# Altium PCB 3V3_Load_Switch_Bodge.PcbDoc
Units mm, origin at the board's own origin, x right, y up, seen from the top; angles counter-clockwise.
Board outline 9.5 x 12.5 mm, 2 copper layers (Top Layer, Bottom Layer); 16 components, 7 nets, 32 pads, 15 vias.
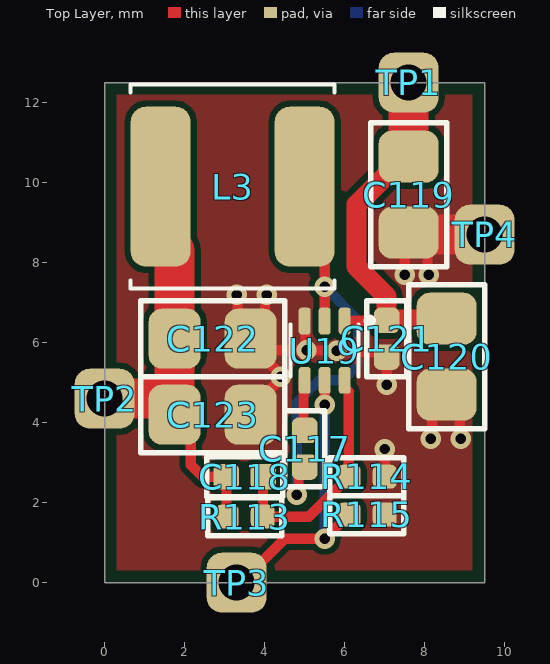
[diagram p0: Top Layer view]
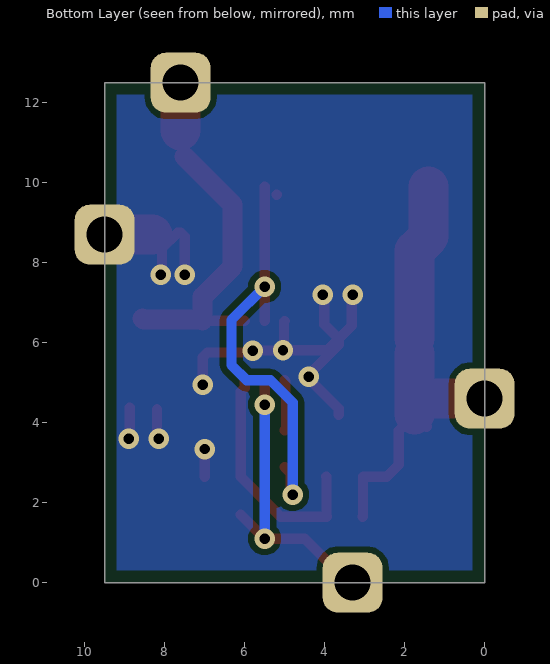
[diagram p1: Bottom Layer view, seen from below]

## Layer stack, top to bottom
Top Solder: solder mask 0.0102, Solder Resist, Dk 3.5
Top Layer: signal copper 0.0356
Dielectric 1: dielectric 0.32, FR-4, Dk 4.8
Bottom Layer: signal copper 0.0356
Bottom Solder: solder mask 0.0102, Solder Resist, Dk 3.5

## Board outline
0,0 9.5,0 9.5,12.5 0,12.5

## Design rules (kind name [scope] priority, off if disabled: settings)
BoardOutlineClearance [All] p1: gap=0.3 ignorepadtopadclearanceinfootprint=FALSE
Clearance [All] p1: gap=0.152 ignorepadtopadclearanceinfootprint=FALSE
HoleSize [All] p1: absolutevalues=TRUE maxlimit=15 minlimit=0.025 maxpercent=80.000 minpercent=20.000
HoleToHoleClearance [All] p1: gap=0 allowstackedmicrovias=TRUE
MinimumSolderMaskSliver [All] p1: minsoldermaskwidth=0.102
PlaneConnect [All] p1: planeconnectstyle=Direct reliefexpansion=0.508 reliefentries=4 reliefconductorwidth=0.254 reliefairgap=0.254
PolygonConnect [All] p1: connectstyle=Direct reliefconductorwidth=0.254 reliefentries=4 polygonreliefangle="90 Angle" airgapwidth=0.254
RoutingVias [All] p1: holewidth=0.254 width=0.508 viastyle="Through Hole" minholewidth=0.254 minwidth=0.508 maxholewidth=0.254 maxwidth=0.508
SolderMaskExpansion [All] p1: expansion=0.038 istentingtop=FALSE
Width [All] p1: maxlimit=1 minlimit=0.152 preferedwidth=0.254 minimp=50.000000 maximp=50.000000 favimp=50.000000
26 further rules are at their usual default settings.

## Components (designator, comment, footprint, x,y, rotation, side; value= is the part's Value field where it differs from the comment)
C117 "100nF" GEN_C_0402 5,3.35 r90 top
C118 "39pF" GEN_C_0402 3.5,2.65 r180 top
C119 "22uF" GEN_C_0805 7.6,9.7 r90 top
C120 "22uF" GEN_C_0805 8.55,5.65 r90 top
C121 "100nF" GEN_C_0402 7.05,6.1 r270 top
C122 "22uF" GEN_C_0805 2.7,6.1 r180 top
C123 "22uF" GEN_C_0805 2.7,4.2 r180 top
L3 "4.7uH" TY_IND_NRS5030 3.2,9.9 r180 top
R113 "30k" GEN_R_0402 3.5,1.65 r180 top
R114 "10K" GEN_R_0402 6.55,2.65 r180 top
R115 "10K" GEN_R_0402 6.55,1.7 r0 top
TP1 "TP THT" GEN_1_Pin_TH_TP#1 7.8,12.5 r0 top
TP2 "TP THT" GEN_1_Pin_TH_TP#2 0,4.6 r0 top
TP3 "TP THT" GEN_1_Pin_TH_TP#3 2.3,0 r90 top
TP4 "TP THT" GEN_1_Pin_TH_TP#2 9.5,8.7 r90 top
U19 "TPS562202" TI_SOT563_DRL0006A 5.5,5.8 r270 top

## Footprints (in the part's own frame and the unit in brackets; to place one, negate y for a bottom-side part, rotate by r counter-clockwise, add the part's x,y. Pads: shape width x height; smd on the part's side, far side on the other; paste and mask are expansions set on the pad)
GEN_1_Pin_TH_TP#1 [mm]
  rrect50% 1.5x1.5 hole 0.9: 1(-0.2,0)
GEN_1_Pin_TH_TP#2 [mm]
  rrect50% 1.5x1.5 hole 0.9: 1(0,0)
GEN_1_Pin_TH_TP#3 [mm]
  rrect50% 1.5x1.5 hole 0.9: 1(0,-1)
GEN_C_0402 [mm] "Chip Capacitor, 0402, IPC Medium Density"
  rrect50% 0.64x0.64 smd: 1(-0.46,0) 2(0.46,0)
  silkscreen extent -0.95,-0.5 0.95,0.5, body extent -0.55,-0.3 0.55,0.3, height 0.6
GEN_C_0805 [mm] "Chip Capacitor, 2-Leads, Body 2.00x1.25mm, IPC Medium Density"
  rrect50% 1.3x1.5 smd: 1(-0.95,0) 2(0.95,0)
  silkscreen extent -1.8,-0.95 1.8,0.95, body extent -1.1,-0.72 1.1,0.72, height 1.45
GEN_R_0402 [mm] "Chip Resistor, 2-Leads, Body 1.00x0.50mm, IPC Medium Density"
  rrect50% 0.6x0.6 smd: 1(-0.45,0) 2(0.45,0)
  silkscreen extent -0.92,-0.48 0.92,0.48, body extent -0.55,-0.3 0.55,0.3, height 0.4
TI_SOT563_DRL0006A [mm] "SOTFL, 6-Leads, Body 1.60x1.60mm, Pitch 0.50mm, IPC Medium Density"
  rrect50% 0.67x0.3 smd: 1(-0.74,0.5) 2(-0.74,0) 3(-0.74,-0.5) 4(0.74,-0.5) 5(0.74,0) 6(0.74,0.5)
  silkscreen extent -0.82,-0.85 0.65,1.2, body extent -0.8,-0.85 0.8,0.85, height 0.6
TY_IND_NRS5030 [mm] "Precision Wire Wound Inductor, 2-Leads, Body 4.90x4.90mm, IPC Medium Density"
  rrect50% 1.5x4 smd: 1(-1.8,0) 2(1.8,0)
  silkscreen extent -2.55,-2.55 2.55,2.55, body extent -2.55,-2.45 2.55,2.45, height 3.2

## Part data
C117 C121: library part "CAP 100nF 16V X7R 0402", House Part Number=C-100nF-0402-002, Manufacturer=Murata, Manufacturer Part Number=GCM155R71C104KA55D, Package=0402, Supplier Part Number 1=81-GCM155R71C104KA5D, Voltage Rating=16V, Supplier 1=Mouser
C118: library part "CAP 39pF 50V C0G 0402", House Part Number=C-39pF-0402-002, Manufacturer=KEMET, Manufacturer Part Number=C0402C390J5GACTU, Package=0402, Supplier Part Number 1=80-C0402C390J5G, Temperature Coefficient=C0G, Voltage Rating=50V, Supplier 1=Mouser
C119 C120 C122 C123: library part "CAP 22uF 25V X5R 0805", House Part Number=C-22uF-0805-002, Manufacturer=Murata, Manufacturer Part Number=GRM21BR61E226ME44L, Package=0805, Supplier Part Number 1=81-GRM21BR61E226ME4L, Voltage Rating=25V, Supplier 1=Mouser
L3: library part "IND 4.7uH 2.6A 35 MOHM SMD", Manufacturer="Taiyo Yuden", Manufacturer Part Number=NRS5030T4R7MMGJ, Supplier Part Number 1=963-NRS5030T4R7MMGJ, Supplier 1=Mouser
R113: library part "RES 30K OHM 1% 1/16W 0402", Manufacturer=Yageo, Manufacturer Part Number=RC0402FR-0730KL, Package=0402, Supplier Part Number 1=603-RC0402FR-0730KL, Tolerance=1%, Supplier 1=Mouser
R114 R115: library part "RES 10K OHM 1% 1/10W 0402", Manufacturer=Panasonic, Manufacturer Part Number=ERJ-2RKF1002X, Package=0402, Supplier Part Number 1=667-ERJ-2RKF1002X, Tolerance=1%, Supplier 1=Mouser
U19: library part "IC BUCK TPS562202", Supplier Part Number 1=TPS562202DRLR, Supplier 1="Texas Instruments"

## Via types
v1: diameter 0.508, hole 0.254, Top Layer to Bottom Layer, tented both sides, 15 vias

## Nets (pads, with @x,y where several pads share a name; then routed paths per layer and width w, separated by ;. In a path a pad name is that pad's centre, name@x,y a point inside that pad or via, vN(x,y) a via of type N, cw(c..) or ccw(c..) an arc to the next point about the centre after c; other vN are vias at no path point)
+3V3: C118.2 C122.2 C123.2 L3.2 R113.2 TP2.1 | length 9.7
  Top Layer w0.254: C123.2@1.45,3.9 C123.2 2.151,3.799 2.151,2.949 2.45,2.65 C118.2 3.045,2.645 3.045,1.655 R113.2
  Top Layer w1: 0.8,4.6 C123.2@1.2,4.6 ; L3.2 1.4,8.65 1.75,8.3 C122.2 ; C123.2 1.75,5.15 C122.2@1.75,5.725
+12V: C119.2 C120.2 C121.1 TP1.1 U19.1 | length 8
  Top Layer w0.254: U19.1 6.01,6.55 7.04,6.55 C121.1 ; C119.2@7.5,10.65 C119.2
  Top Layer w0.5: C119.2@7.5,10.65 6.3,9.45 6.3,7.9 7.05,7.15 C121.1 7.07,6.58 8.53,6.58 C120.2
  Top Layer w1: C119.2@7.6,11.3 7.6,11.7
ACQ_EN: R115.1 TP3.1 U19.5 | length 6.7
  Top Layer w0.254: TP3.1@3.9,0.5 4.5,1.1 v1(5.5,1.1) R115.1 ; v1(5.5,4.45) U19.5
  Bottom Layer w0.254: v1(5.5,1.1) v1(5.5,4.45)
GND: C119.1 C120.1 C121.2 C122.1 C123.1 R114.1 R115.2 TP4.1 U19.3 | length 14.9
  Top Layer w0.254: v1(3.3,7.2) 3.326,7.174 3.326,6.424 C122.1 ; C123.1 3.65,4.35 4.4,5.1 v1(4.4,5.15) 4.4,5.2 3.65,5.95 C122.1 ; v1(4.05,7.2) 4.011,7.161 4.011,6.461 C122.1 ; U19.3 5.015,6.525 5.015,5.839 v1@5.031,5.824 ; R114.1 v1(7,3.34) ; v1(7.05,4.95) C121.2 6.939,5.751 5.849,5.751 5.794,5.806 5.033,5.806 5.027,5.8 5.015,5.812 3.938,5.812 C122.1 ; v1(7.5,7.7) 7.5,8.65 C119.1 ; C119.1@7.675,8.75 8.071,8.354 8.071,7.729 v1(8.1,7.7) ; v1@8.189,3.639 C120.1@8.189,4.339 ; v1@8.874,3.626 C120.1@8.874,4.376
  Top Layer w1: C119.1@8.3,8.7 8.7,8.7
  other v1: 8.15,3.6 8.9,3.6 5.8,5.8 5.043,5.812
NetC117_1: C117.1 L3.1 U19.2 | length 10.7
  Top Layer w0.254: v1(4.8,2.2) 4.849,2.249 4.849,2.739 C117.1 ; U19.2 v1(5.5,7.4) L3.1@5.5,9.9
  Bottom Layer w0.254: v1(4.8,2.2) 4.8,4.504 5.356,5.06 5.951,5.06 6.333,5.442 6.333,6.567 v1(5.5,7.4)
NetC117_2: C117.2 U19.4 | length 1.3
  Top Layer w0.254: C117.2 4.967,3.843 4.967,4.671 4.977,4.681 4.977,5.037 U19.4
NetC118_1: C118.1 R113.1 R114.2 U19.6 | length 6
  Top Layer w0.254: C118.1 3.955,2.645 3.955,1.655 R113.1 5.1,1.65 R114.2 6.1,4.775 6,4.875 U19.6

## Polygon pours and split planes (outlines as drawn)
GND on Top Layer "GND_L01_P000" (solid, pour order 0): 0,12.5 9.5,12.5 9.5,0 0,0
GND on Bottom Layer "GND_L02_P001" (solid, pour order 1): 0,12.5 9.5,12.5 9.5,0 0,0

## Silkscreen, mask and mechanical layers (free items; w line width, h text height)
Mechanical 1:
  the board outline again, w0.127